# EAGLE board DC Electronic Load (EAGLE 9.4.0)
ERSTELLER: Jakob Holz; PROJEKT: DC Electronic Load; VERSION: V1.0

Size 160 x 100 mm. Coordinates in mm from the lower left corner, seen from the top.
Outline: 0,0 160,0 160,100 0,100 0,0
Copper layers (1*16): Top 0.035mm / dielectric 1.5mm / Bottom 0.035mm
Design rules "default": minimum track width 6mil, minimum drill 0.35mm, track to track 6mil, track to pad 6mil, pad to pad 6mil, via to via 6mil, smd to smd 6mil, copper to edge 40mil, drill to drill 6mil, minimum pad ring 10mil, minimum via ring 8mil, stop-mask expansion 4mil, vias tented up to drill 0mil, thermal gap 10mil

## Footprints (pad centres in the part's own frame; a part is rotated, then mirrored left to right if it is on the bottom)
C1206 = smd 1.6 x 1.8: 1 -1.4,0; 2 1.4,0
MELF-MLL41 = smd 2.5 x 3: A 2.625,0; C -2.625,0
SO08 = smd 0.6 x 2.2: 1 -1.905,-2.6; 2 -0.635,-2.6; 3 0.635,-2.6; 4 1.905,-2.6; 5 1.905,2.6; 6 0.635,2.6; 7 -0.635,2.6; 8 -1.905,2.6
AZ8 = drill 1.4 pad 2: 1 8.89,6.35; 2 -3.81,6.35; 3 -8.89,-1.27; 4 -3.81,-6.35; 5 -8.89,6.35
TO247BV = drill 1.499 long: D 0,-2.921; G -5.588,-2.921; S 5.588,-2.921
SOT23 = smd 1 x 1.4: 1 -0.95,-1.1; 2 0.95,-1.1; 3 0,1.1
R1206 = smd 1.6 x 1.803: 1 -1.422,0; 2 1.422,0
VTA53 = drill 1.1 octagon: 1 -12.065,0; 2 12.065,0
RTRIM64W = drill 0.61: 1 1.27,-2.54; 2 1.27,0; 3 1.27,2.54
SOIC-8 = smd 1.525 x 0.65: 1 -2.712,1.905; 2 -2.712,0.635; 3 -2.712,-0.635; 4 -2.712,-1.905; 5 2.712,-1.905; 6 2.712,-0.635; 7 2.712,0.635; 8 2.712,1.905
SOIC−14 = smd 1.55 x 0.65: 1 -2.725,3.81; 2 -2.725,2.54; 3 -2.725,1.27; 4 -2.725,0; 5 -2.725,-1.27; 6 -2.725,-2.54; 7 -2.725,-3.81; 8 2.725,-3.81; 9 2.725,-2.54; 10 2.725,-1.27; 11 2.725,0; 12 2.725,1.27; 13 2.725,2.54; 14 2.725,3.81

## Placement (x,y rotation side)
C1  [C1206]  27.94,163.83 0 top  (outside the outline)
C2  [C1206]  -40.64,133.35 0 top  (outside the outline)
C3  [C1206]  -71.12,69.85 0 top  (outside the outline)
C4  100n  [C1206]  -71.12,59.69 0 top  (outside the outline)
C5  100n  [C1206]  -71.12,54.61 0 top  (outside the outline)
C6  100n  [C1206]  -71.12,49.53 0 top  (outside the outline)
C7  1oon  [C1206]  -71.12,33.02 0 top  (outside the outline)
C8  100n  [C1206]  -88.9,10.16 0 top  (outside the outline)
C9  100n  [C1206]  -88.9,-25.4 0 top  (outside the outline)
C10  [C1206]  -105.41,-83.82 0 top  (outside the outline)
C11  10nF  [C1206]  -105.41,-93.98 0 top  (outside the outline)
C12  10nF  [C1206]  -105.41,-99.06 0 top  (outside the outline)
C13  10nF  [C1206]  -105.41,-104.14 0 top  (outside the outline)
C14  10nF  [C1206]  -105.41,-109.22 0 top  (outside the outline)
C15  10nF  [C1206]  -99.06,-158.75 0 top  (outside the outline)
D3  1N4001  [MELF-MLL41]  -77.47,27.94 0 top  (outside the outline)
IC1  LM393D  [SO08]  -69.85,40.64 0 top  (outside the outline)
IC2  TL072D  [SO08]  -86.36,-17.78 0 top  (outside the outline)
K1  AZ8-FORM-C  [AZ8]  -63.5,93.98 0 top  (outside the outline)
Q1  IRFP240  [TO247BV]  127,93.98 0 top
Q2  IRFP240  [TO247BV]  91.44,93.98 0 top
Q3  IRFP240  [TO247BV]  57.15,93.98 0 top
Q4  IRFP240  [TO247BV]  25.4,93.98 0 top
Q5  NPN  [SOT23]  -49.53,111.76 0 top  (outside the outline)
Q6  NPN  [SOT23]  -57.15,111.76 0 top  (outside the outline)
Q7  NPN  [SOT23]  -64.77,111.76 0 top  (outside the outline)
Q8  NPN  [SOT23]  -72.39,111.76 0 top  (outside the outline)
Q9  NPN  [SOT23]  -80.01,36.83 0 top  (outside the outline)
Q10  IRFP240  [TO247BV]  -100.33,-147.32 0 top  (outside the outline)
Q11  NPN  [SOT23]  -88.9,-149.86 0 top  (outside the outline)
Q12  IRFP240  [TO247BV]  -100.33,-162.56 0 top  (outside the outline)
Q13  IRFP240  [TO247BV]  -100.33,-170.18 0 top  (outside the outline)
Q14  IRFP240  [TO247BV]  -100.33,-177.8 0 top  (outside the outline)
Q15  IRFP240  [TO247BV]  -100.33,-185.42 0 top  (outside the outline)
R1  [R1206]  27.94,189.23 0 top  (outside the outline)
R2  [R1206]  27.94,184.15 0 top  (outside the outline)
R3  [R1206]  27.94,179.07 0 top  (outside the outline)
R4  [R1206]  27.94,173.99 0 top  (outside the outline)
R5  [R1206]  27.94,168.91 0 top  (outside the outline)
R6  [R1206]  6.35,158.75 0 top  (outside the outline)
R7  1R  [VTA53]  132.08,71.12 90 top
R8  1R  [VTA53]  96.52,71.12 90 top
R9  1R  [VTA53]  63.5,73.66 90 top
R10  1R  [VTA53]  30.48,73.66 90 top
R11  [R1206]  -40.64,128.27 0 top  (outside the outline)
R12  2K2  [R1206]  -40.64,123.19 0 top  (outside the outline)
R13  2K2  [R1206]  -40.64,118.11 0 top  (outside the outline)
R14  2K2  [R1206]  -40.64,113.03 0 top  (outside the outline)
R15  2K2  [R1206]  -40.64,107.95 0 top  (outside the outline)
R16  [R1206]  -71.12,102.87 0 top  (outside the outline)
R17  [R1206]  -71.12,80.01 0 top  (outside the outline)
R18  [R1206]  -71.12,74.93 0 top  (outside the outline)
R19  [R1206]  -71.12,64.77 0 top  (outside the outline)
R20  [R1206]  -78.74,20.32 0 top  (outside the outline)
R21  [R1206]  -78.74,15.24 0 top  (outside the outline)
R22  [R1206]  -88.9,3.81 0 top  (outside the outline)
R23  [R1206]  -88.9,-1.27 0 top  (outside the outline)
R24  [R1206]  -88.9,-6.35 0 top  (outside the outline)
R25  [R1206]  -88.9,-11.43 0 top  (outside the outline)
R26  10k  [R1206]  -88.9,-31.75 0 top  (outside the outline)
R27  10k  [R1206]  -88.9,-36.83 0 top  (outside the outline)
R28  10k  [R1206]  -88.9,-41.91 0 top  (outside the outline)
R29  10k  [R1206]  -88.9,-46.99 0 top  (outside the outline)
R30  [R1206]  -88.9,-52.07 0 top  (outside the outline)
R31  [R1206]  -101.6,21.59 270 top  (outside the outline)
R32  3k  [R1206]  -88.9,-62.23 0 top  (outside the outline)
R33  10k  [R1206]  -88.9,-67.31 0 top  (outside the outline)
R34  1M  [R1206]  -88.9,-72.39 0 top  (outside the outline)
R35  3k  [R1206]  -88.9,-77.47 0 top  (outside the outline)
R36  [RTRIM64W]  -97.79,-74.93 0 top  (outside the outline)
R37  [R1206]  -105.41,-88.9 0 top  (outside the outline)
R38  100R  [R1206]  -105.41,-115.57 0 top  (outside the outline)
R39  100R  [R1206]  -105.41,-120.65 0 top  (outside the outline)
R40  100R  [R1206]  -105.41,-125.73 0 top  (outside the outline)
R41  100R  [R1206]  -105.41,-130.81 0 top  (outside the outline)
R42  1R  [VTA53]  -95.25,-140.97 0 top  (outside the outline)
R43  2K2  [R1206]  -92.71,-158.75 0 top  (outside the outline)
R44  100R  [R1206]  -105.41,-158.75 0 top  (outside the outline)
R45  1R  [VTA53]  -95.25,-200.66 0 top  (outside the outline)
R46  1R  [VTA53]  -95.25,-213.36 0 top  (outside the outline)
R47  1R  [VTA53]  -95.25,-226.06 0 top  (outside the outline)
R48  1R  [VTA53]  -95.25,-238.76 0 top  (outside the outline)
U1  AD8628  [SOIC-8]  21.59,168.91 0 top  (outside the outline)
U2  AD8628  [SOIC-8]  13.97,168.91 0 top  (outside the outline)
U3  OPA196  [SOIC-8]  6.35,168.91 0 top  (outside the outline)
U4  SN74AHC08  [SOIC−14]  -101.6,29.21 90 top  (outside the outline)
U5  OPA196  [SOIC-8]  -113.03,-237.49 0 top  (outside the outline)
U6  OPA196  [SOIC-8]  -120.65,-237.49 0 top  (outside the outline)

## Library data of the parts
C1-C15 = rcl; SPICEPREFIX: C
D3 = diode
IC1 IC2 = linear
K1 = relay; OC_FARNELL: unknown; OC_NEWARK: unknown
Q1-Q4 Q10 Q12-Q15 = transistor-power
Q5-Q9 Q11 U1-U6 = Jakobs_LBR
R1-R6 R11-R35 R37-R41 R43 R44 = rcl; SPICEPREFIX: R
R7-R10 R36 R42 R45-R48 = resistor

## Nets
+5V: C4.1 C5.1 C7.1 C8.1 C9.1 IC1.8 IC2.8 R30.2 R31.2 R32.2 R35.1 U1.7 U2.7 U4.14
+12V: C6.1 D3.C K1.2 U3.7
+VLOAD: Q1.D Q2.D Q3.D Q4.D R18.2 R24.2 R37.2
+VLOAD1: Q10.D
-5V: R38.1 R39.1 R40.1 R41.1 R44.1
-VLOAD: C3.1 K1.3 R19.2 R22.2 U2.2 U2.6
GND: C1.2 C3.2 C4.2 C5.2 C6.2 C7.2 C8.2 C9.2 IC1.4 IC2.4 K1.1 Q9.2 R1.1 R3.2 R6.1 R17.1 R23.1 R25.1 R26.1 R36.1 R36.2 U1.4 U2.4 U3.4 U4.7
INPUT: K1.4
ISENSE: IC1.2 R5.2 R11.1 R28.1 U3.2
ISET: U3.3
N$1: C1.1 R2.2 R5.1 U1.6
N$2: R1.2 R2.1 U1.2
N$3: R3.1 R4.2 U1.3
N$4: C10.2 R4.1 R6.2 R7.1 R8.1 R9.1 R10.1
N$5: IC1.6 R22.1 R23.2
N$6: IC1.5 R24.1 R25.2
N$7: C2.1 R11.2
N$8: C2.2 R16.1 U3.6
N$9: Q1.S Q5.1 R7.2
N$10: Q2.S Q6.1 R8.2
N$11: Q3.S Q7.1 R9.2
N$12: Q4.S Q8.1 R10.2
N$13: C11.1 C12.1 C13.1 C14.1 R12.2 R13.2 R14.2 R15.2 R16.2
N$14: C11.2 Q1.G Q5.3 R12.1
N$15: C12.2 Q2.G Q6.3 R13.1
N$16: C13.2 Q3.G Q7.3 R14.1
N$17: C14.2 Q4.G Q8.3 R15.1
N$18: IC1.7 R32.1 U4.2
N$19: Q6.2 R39.2
N$20: R17.2 R18.1 U2.3
N$21: D3.A K1.5 R20.2
N$22: Q9.3 R20.1
N$23: U4.3 U4.4
N$24: Q9.1 R21.2
N$25: R31.1 U4.5
N$26: IC1.1 R34.2 R35.2 U4.1
N$27: IC2.3 R28.2 R29.2
N$28: IC2.2 R26.2 R27.1
N$29: IC2.1 R27.2 R33.1
N$30: IC1.3 R33.2 R34.1
N$31: R29.1 R30.1 R36.3
N$32: R21.1 U4.6
N$33: C10.1 R37.1
N$34: Q7.2 R40.2
N$35: Q8.2 R41.2
N$36: Q5.2 R38.2
N$37: R42.1
N$38: Q10.S Q11.1 R42.2
N$39: C15.1 R43.2
N$40: C15.2 Q10.G Q11.3 R43.1
N$41: Q11.2 R44.2
N$42: Q12.G U5.6
N$43: Q12.D
N$44: Q12.S R45.2 U5.2
N$45: Q13.D
N$46: Q14.D
N$47: Q15.D
N$48: Q13.S R46.2 U6.2
N$49: Q13.G U6.6
N$50: U5.3 U6.3

## Tracks (layer width: path | path; a pad name or v marks a point on that pad's centre or on a via)
+5V  (13 unrouted)
+12V  (3 unrouted)
+VLOAD  (6 unrouted)
-5V  (4 unrouted)
-VLOAD  (5 unrouted)
GND  (24 unrouted)
ISENSE  (4 unrouted)
N$1  (3 unrouted)
N$2  (2 unrouted)
N$3  (2 unrouted)
N$4  (6 unrouted)
N$5  (2 unrouted)
N$6  (2 unrouted)
N$7  (1 unrouted)
N$8  (2 unrouted)
N$9  (2 unrouted)
N$10  (2 unrouted)
N$11  (2 unrouted)
N$12  (2 unrouted)
N$13  (8 unrouted)
N$14  (3 unrouted)
N$15  (3 unrouted)
N$16  (3 unrouted)
N$17  (3 unrouted)
N$18  (2 unrouted)
N$19  (1 unrouted)
N$20  (2 unrouted)
N$21  (2 unrouted)
N$22  (1 unrouted)
N$23  (1 unrouted)
N$24  (1 unrouted)
N$25  (1 unrouted)
N$26  (3 unrouted)
N$27  (2 unrouted)
N$28  (2 unrouted)
N$29  (2 unrouted)
N$30  (2 unrouted)
N$31  (2 unrouted)
N$32  (1 unrouted)
N$33  (1 unrouted)
N$34  (1 unrouted)
N$35  (1 unrouted)
N$36  (1 unrouted)
N$38  (2 unrouted)
N$39  (1 unrouted)
N$40  (3 unrouted)
N$41  (1 unrouted)
N$42  (1 unrouted)
N$44  (2 unrouted)
N$48  (2 unrouted)
N$49  (1 unrouted)
N$50  (1 unrouted)